# Altium PCB Peripheral_Processor_PCB_V2.PcbDoc (part 2 of 3)
Units mil, origin at the board's own origin, x right, y up, seen from the top; angles counter-clockwise.
Board outline 5600 x 4000 mil, 4 copper layers (Top Layer, Plane(Gnd), Plane(Power), Bottom Layer), stack 23.756 mil thick; 207 components, 234 nets, 739 pads, 214 vias.
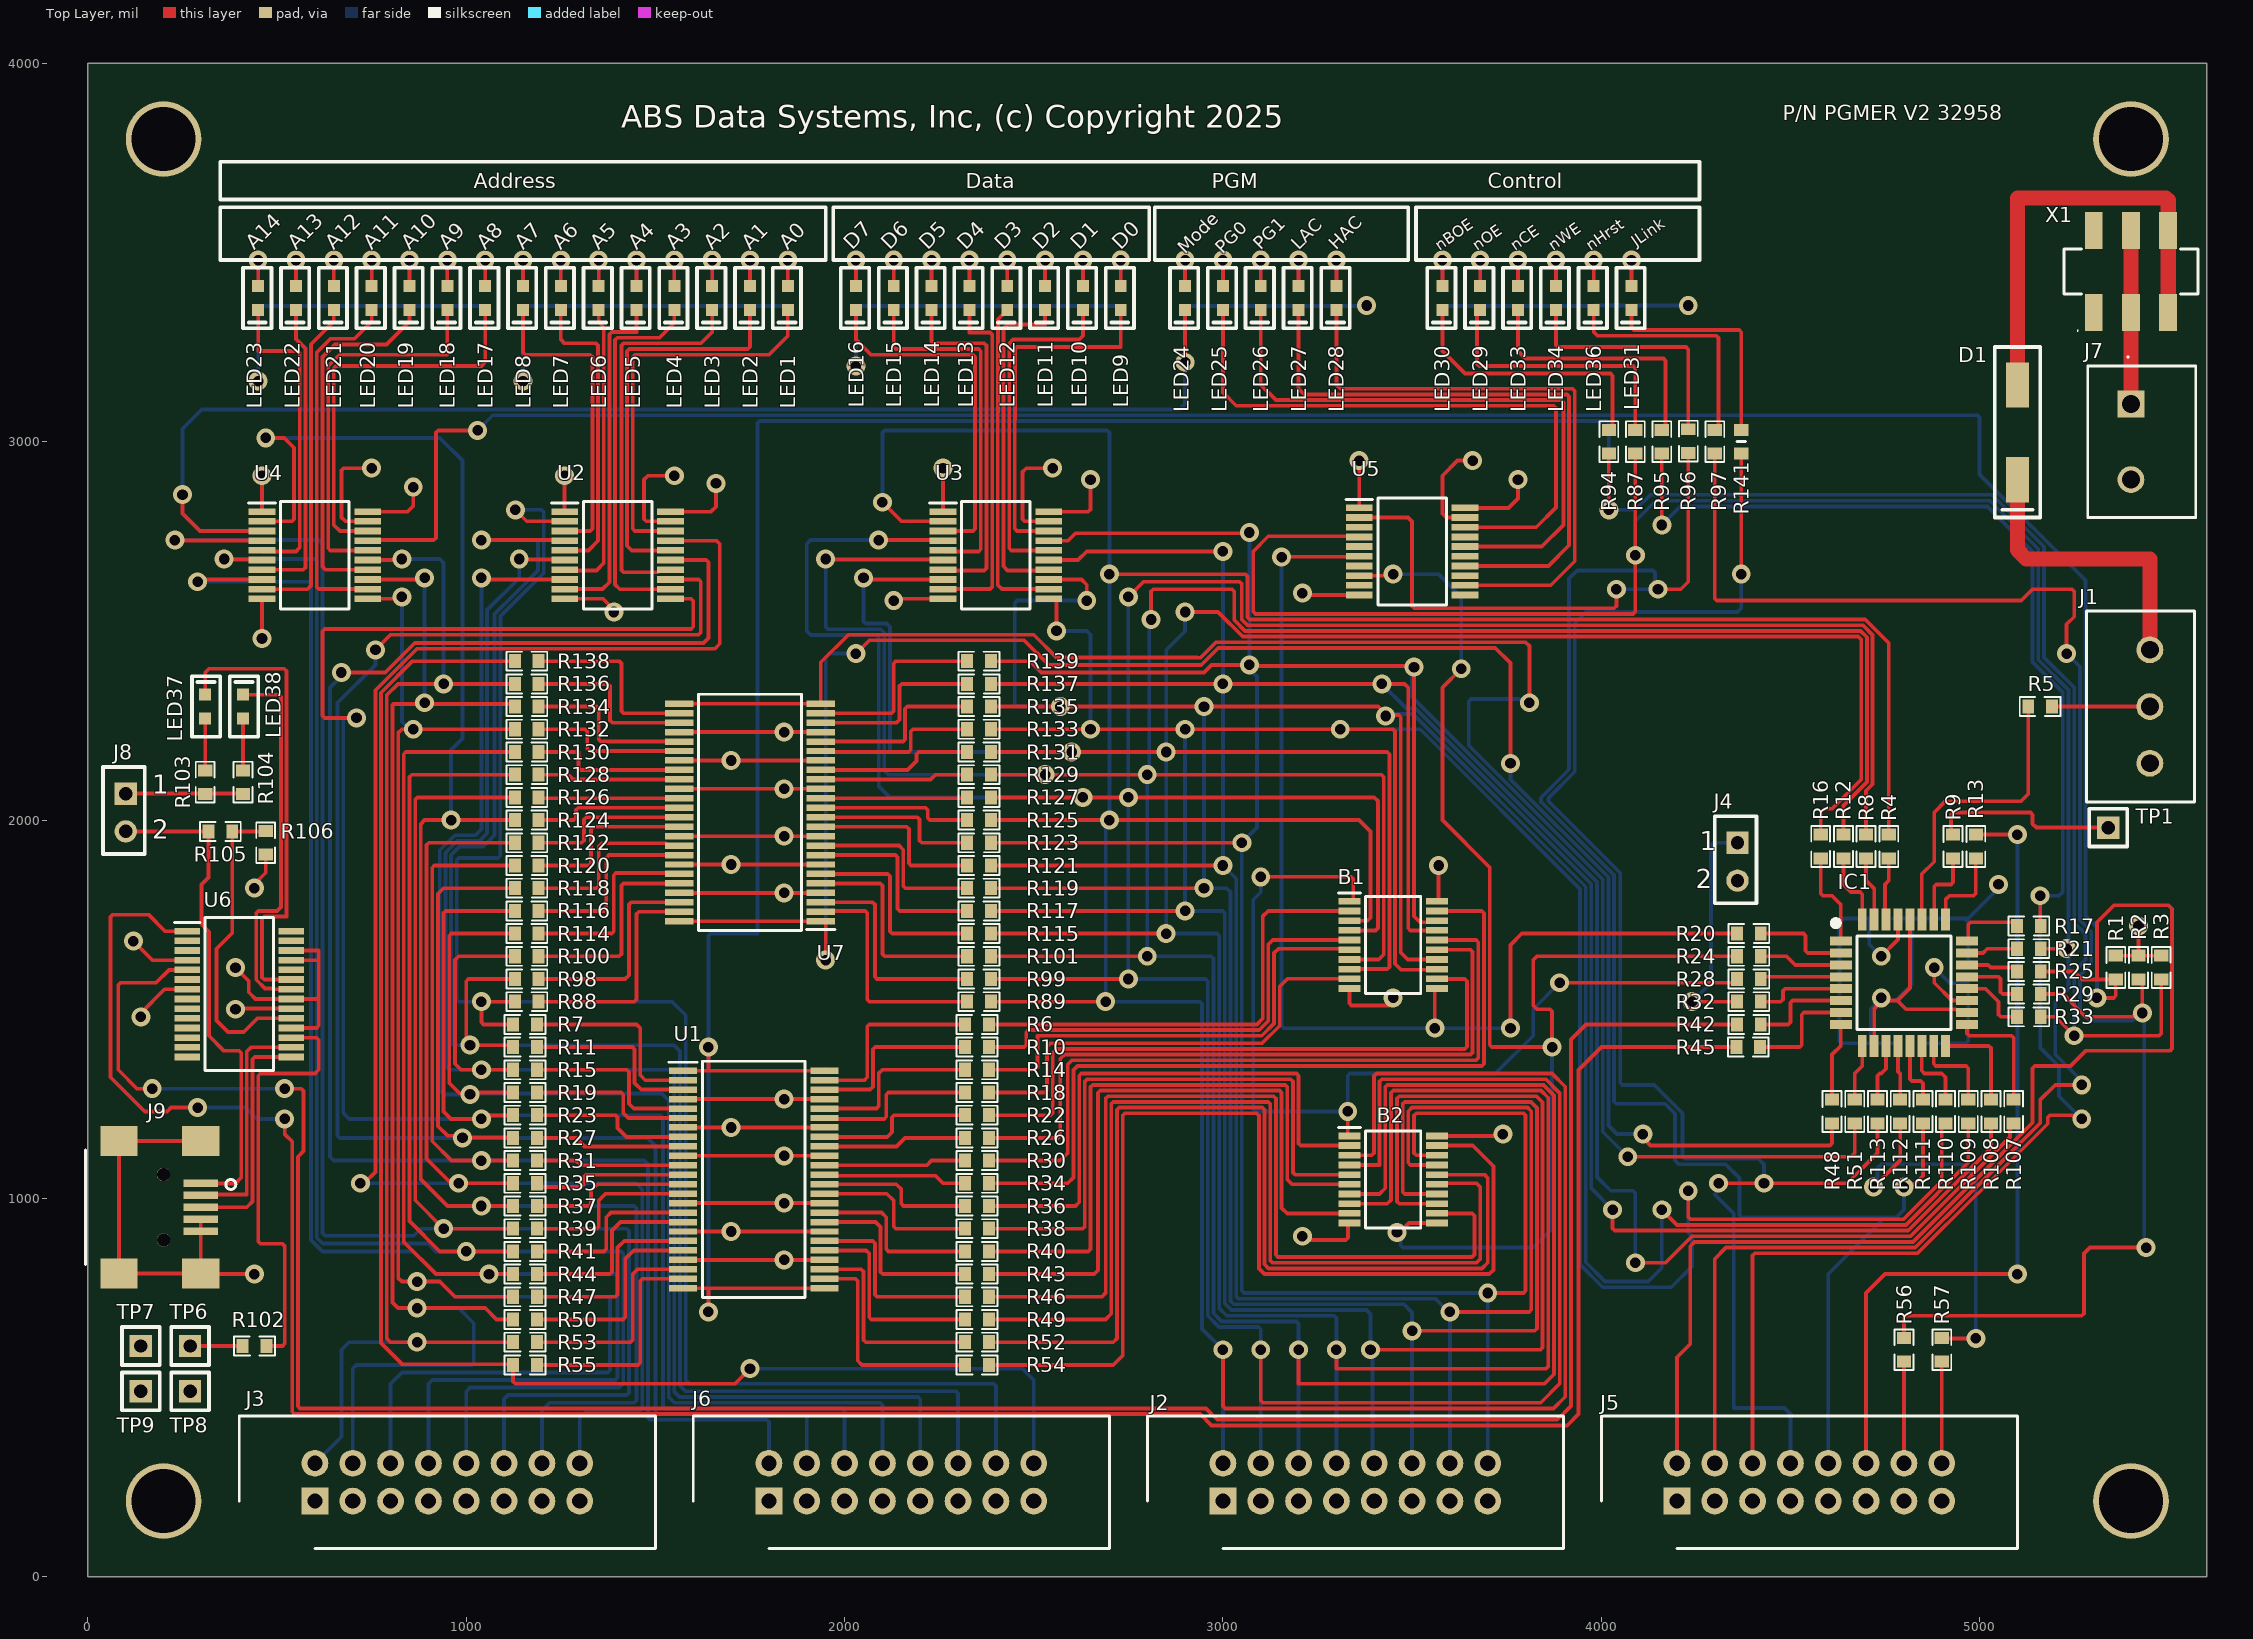
[diagram p0: Top Layer view]

## Via types
v1: diameter 50, hole 28, Top Layer to Bottom Layer, 214 vias

## Nets (pads, with @x,y where several pads share a name; then routed paths per layer and width w, separated by ;. In a path a pad name is that pad's centre, name@x,y a point inside that pad or via, vN(x,y) a via of type N, cw(c..) or ccw(c..) an arc to the next point about the centre after c; other vN are vias at no path point) (continued)
D6: (continued)
  Bottom Layer w10: v1(3000,2710) v1(3000,2360) v1(3000,1880) 3035,1845 3035,740.86 3040.86,735 3561.94,735 3596.94,700 v1(3600,700) J2.14@3600,300 ; v1(3420,2360) 3484.82,2295.18 3508.76,2295.18 3973.79,1830.15 3973.79,1026.21 v1(4030,970)
D7: B1.18 B2.18 J2.16 R107.2 R123.2 R139.2 U3.17 | length 10262.5
  Top Layer w10: R123.2@2386.5,1940 v1(3050,1940) ; R139.2@2386.5,2420 2490,2420 2520,2390 2950,2390 2970,2410 v1(3070,2410) ; U3.17@2539.76,2738.39 2590.2,2738.39 2610.02,2758.21 3068.21,2758.21 v1(3070,2760) ; v1@3070,2407.07 3502.07,2407.07 v1(3505,2404.14) 3505,1745.86 3520.86,1730 3530,1730 3530.12,1730.12 3561.81,1730.12 B1.18@3565.67,1733.98 ; B2.18@3565.67,1113.98 3510.86,1113.98 3505,1119.83 3505,1219.14 3510.86,1225 3794.14,1225 3800,1219.14 3800,755.86 3794.14,750 v1@3690.38,750 ; v1(4090,830) 4170,830 4240,900 4817.57,900 5080,1162.43 5080,1188.5 R107.2@5090,1198.5
  Bottom Layer w10: v1(3070,2760) 3070,2399.18 3090,2379.18 3090,1980 v1(3050,1940) 3050,755.86 3055.86,750 v1(3700,750) J2.16@3700,300 ; v1(3505,2404.14) 3500,2399.14 3500,2325.15 3988.79,1836.36 3988.79,1056.21 4025,1020 4084.14,1020 4090,1014.14 v1(4090,830)